# Altium PCB CPU_22032016.PcbDoc
Units mil, origin at the board's own origin, x right, y up, seen from the top; angles counter-clockwise.
Board outline 4448.82 x 2185.04 mil, 2 copper layers (Top Layer, Bottom Layer); 33 components, 52 nets, 244 pads, 21 vias.
Unrouted connection lines stored in the file: 10.
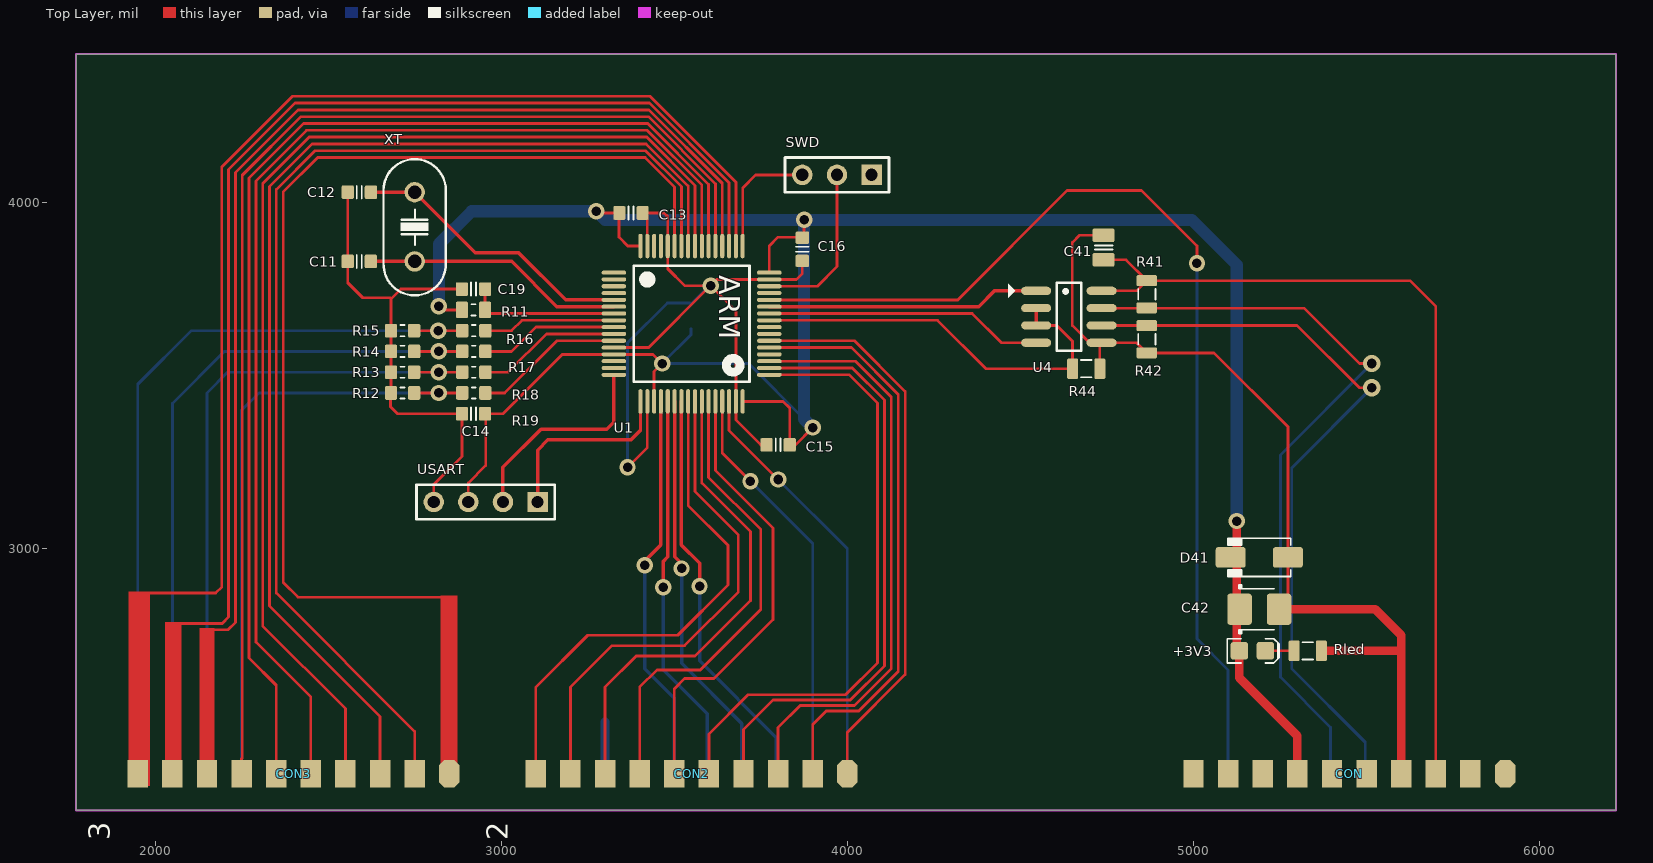
[diagram p0: Top Layer view]
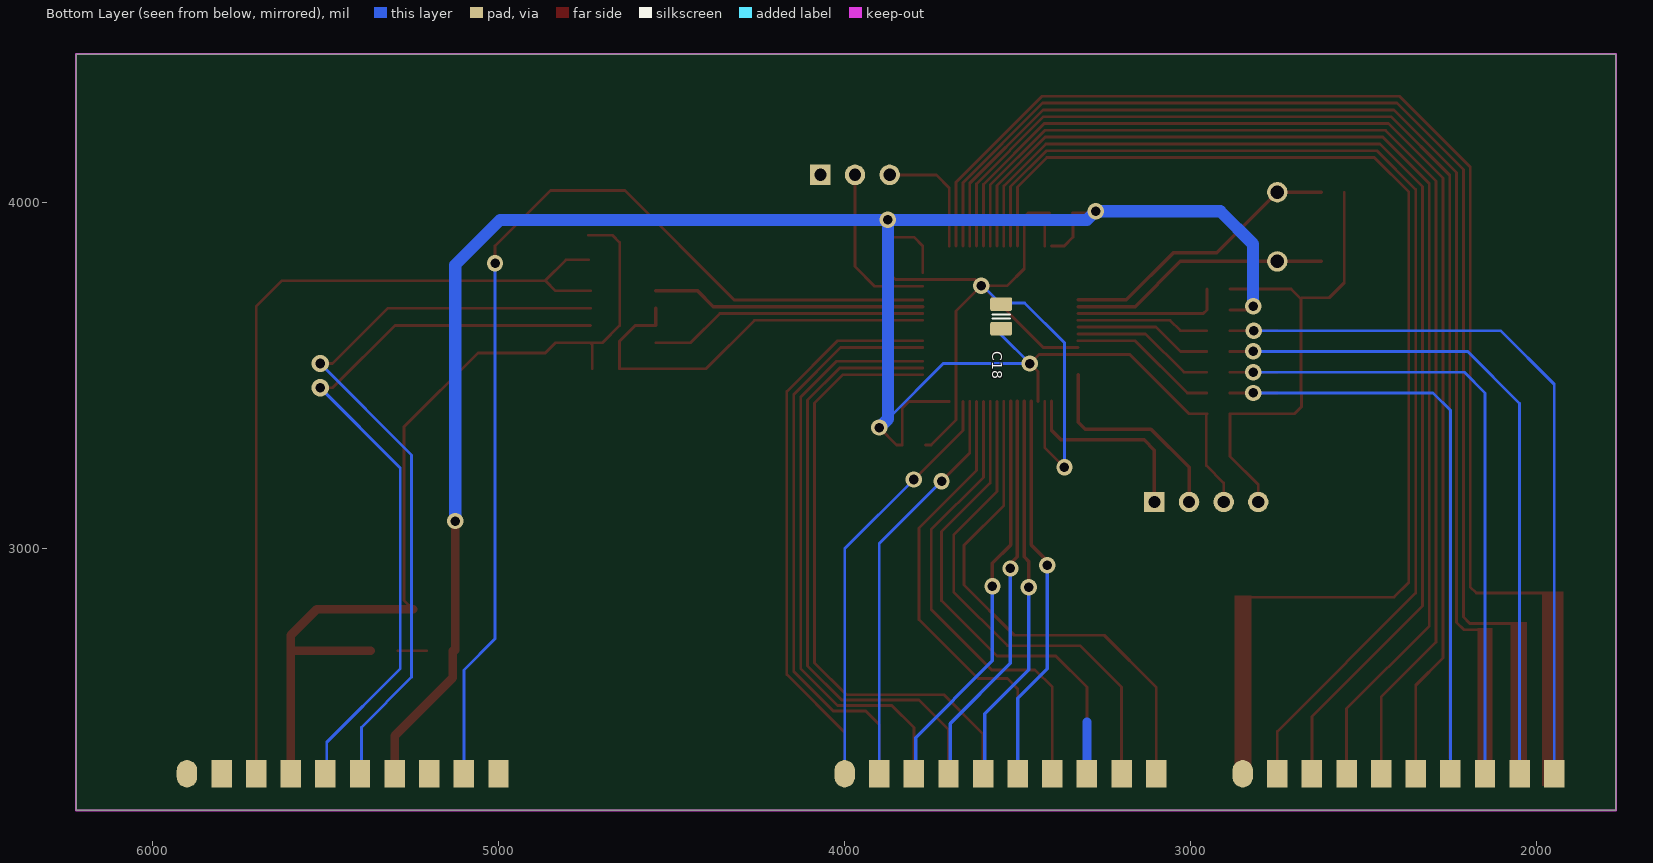
[diagram p1: Bottom Layer view, seen from below]
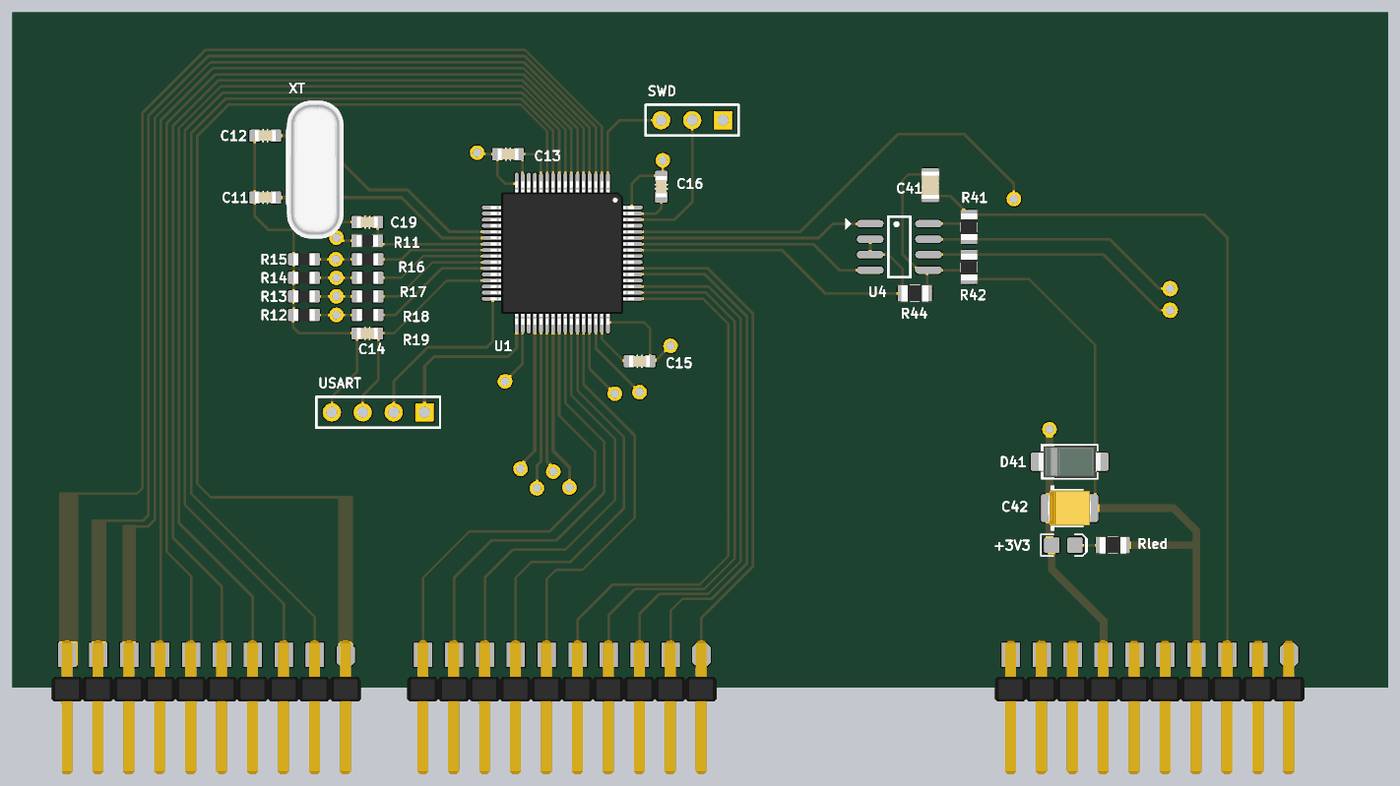
[diagram p2: 3D render of the assembled board from above, using the file's embedded part models]

## Layer stack, top to bottom
Top Solder: solder mask 0.4, Solder Resist, Dk 3.5
Top Layer: signal copper 1.4
Dielectric 1: dielectric 12.6, FR-4, Dk 4.8
Bottom Layer: signal copper 1.4
Bottom Solder: solder mask 0.4, Solder Resist, Dk 3.5

## Board outline
1771.65,2244.09 6220.47,2244.09 6220.47,4429.13 1771.65,4429.13

## Design rules (kind name [scope] priority, off if disabled: settings)
Clearance Clearance_2 [All vs HasPad('FID*')] p1: gap=80
Clearance Clearance_7 [InNet('GND') vs InNet('VAC1')] p2: gap=120
Clearance Clearance_12 [InNet('VAC1') vs InNet('GND')] p3: gap=80
Clearance Clearance_11 [InNet('AGND') vs InNet('GND')] p4: gap=80
Clearance Clearance_8 [InNet('AGND') vs InNet('VAC1')] p5: gap=80
Clearance Clearance_4 [InNet('KDT4') vs (InPoly)] p6: gap=80
Clearance Clearance_5 [InNet('NetK6_2') vs (InPoly)] p7: gap=80
Clearance Clearance_6 [InNet('NetK6_3') vs (InPoly)] p8: gap=80
Clearance Clearance_3 [All vs HasFootprint('XPAD')] p9: gap=2
Clearance Clearance_1 [All vs (InPoly)] p10: gap=40
Clearance [All] p11: gap=7 except(20: Via-Via)
ComponentClearance [All] p1 off: gap=10 collisioncheckmode=3 verticalgap=10 showdistances=FALSE
FabricationTestPointUsage TestPointUsage [All] p1: valid=0 allowmultiple=FALSE
FabricationTestpoint Testpoint [All] p1: side=3 testpointundercomponent=TRUE minsize=40 maxsize=100 preferedsize=60 minholesize=20 maxholesize=40 preferedholesize=32 testpointgrid=1 allowsidetop=TRUE allowsidebottom=TRUE usegrid=TRUE gridtolerance=0.01
HoleSize [All] p1: absolutevalues=TRUE maxlimit=1000 minlimit=0 maxpercent=80.000 minpercent=20.000
PasteMaskExpansion PasteMaskExpansion_1 [HasPad('FID*')] p1: expansion=-160
PasteMaskExpansion [All] p2: expansion=0
PolygonConnect [All] p1: connectstyle=Direct reliefconductorwidth=10 reliefentries=4 polygonreliefangle="90 Angle" airgapwidth=10
RoutingVias [All] p1: holewidth=28 width=50 viastyle="Through Hole" minholewidth=28 minwidth=50 maxholewidth=28 maxwidth=50
SolderMaskExpansion SolderMaskExpansion_1 [HasPad('FID*')] p1: expansion=40
SolderMaskExpansion [All] p2: expansion=4
Width [All] p1: maxlimit=1000 minlimit=5 preferedwidth=40
25 further rules are at their usual default settings.

## Components (designator, comment, footprint, x,y, rotation, side; value= is the part's Value field where it differs from the comment)
+3V3 "Blue" LED-0805-K 5170,2705 r0 top
C11 "Cap_22p_0603" CAPC1608N 2590,3830 r180 top
C12 "Cap_22p_0603" CAPC1608N 2590,4030 r180 top
C13 "Cap_104_0603" CAPC1608N 3375,3970 r180 top
C14 "Cap_104_0603" CAPC1608N 2920,3390 r0 top
C15 "Cap_104_0603" CAPC1608N 3800,3300 r0 top
C16 "Cap_104_0603" CAPC1608N 3870,3865 r90 top
C18 "Cap_10uF_0805" CAPC2012N_F#1 3548,3671 r270 bottom
C19 "Cap_104_0603" CAPC1608N 2920,3750 r0 top
C41 "100nF/104" CAPC2012N_F#2 4740,3870 r270 top
C42 "330uF/25V" CAPMP3528X210N 5190,2825 r0 top
CON "Header 10X2A" OMC10 5900,2350 r180 top
CON2 "Header 10X2A" OMC10 4000,2350 r180 top
CON3 "Header 10X2A" OMC10 2850,2350 r180 top
D41 "Diode" DO-214AC 5190,2975 r180 top
R11 "Res_10k_0603" RESC1608N_F 2920,3690 r180 top
R12 "Res" RESC1608N_ZERO 2715,3450 r180 top
R13 "Res" RESC1608N_ZERO 2715,3510 r180 top
R14 "Res" RESC1608N_ZERO 2715,3570 r0 top
R15 "Res" RESC1608N_ZERO 2715,3630 r0 top
R16 "Res" RESC1608N_ZERO 2920.75,3630 r180 top
R17 "Res" RESC1608N_ZERO 2920.75,3570 r180 top
R18 "Res" RESC1608N_ZERO 2920.75,3510 r180 top
R19 "Res" RESC1608N_ZERO 2920.75,3450 r180 top
R41 "1k" RESC2012N_F 4865,3735 r90 top
R42 "1k" RESC2012N_F 4865,3605 r90 top
R44 "330R" RESC2012N_F 4690,3520 r180 top
Rled "Res_0805_1k" RESC2012N_F 5330,2705 r0 top
SWD "Header 3" HDR1X3 4070,4080 r180 top
U1 "STM32F103RCT6" LQFP64_Tuan 3550,3650 r0 top
U4 "MAX485" SO-8 4640,3670 r0 top
USART "Header 4" HDR1X4 3105,3135 r180 top
XT "8MHz" XT2 2750,3930 r90 top

## Footprints (in the part's own frame and the unit in brackets; to place one, negate y for a bottom-side part, rotate by r counter-clockwise, add the part's x,y. Pads: shape width x height; smd on the part's side, far side on the other; paste and mask are expansions set on the pad)
CAPC1608N [mm] "Chip Capacitor, Body 1.6x0.8mm, 0603, IPC Medium Density"
  round 0.254 on Mech14: 0(0,0)
  rrect25% 0.9x1 smd: 1(-0.85,0) 2(0.85,0)
  Top Layer pour cut-out: -0.4,0.6 0.4,0.6 0.4,-0.6 -0.4,-0.6
  silkscreen extent -0.18,-0.48 0.18,0.48, body extent -0.85,-0.45 0.85,0.45, height 0.89
CAPC2012N_F#1 [mm] "Chip Capacitor, Body 2.0x1.2mm, 0805, IPC Medium Density, for Flex circuits"
  round 0.254 on Mech14: 0(0,0)
  rrect25% 1.2x1.4 on Bottom Solder: 1(-0.9,0) 1(0.9,0)
  rrect25% 1x1.6 smd paste-1: 1(-0.9,0) 2(0.9,0)
  rrect25% 1x1.4 on Bottom Paste: 1(-0.9,0) 1(0.9,0)
  Top Layer pour cut-out: -0.4,0.8 0.4,0.8 0.4,-0.8 -0.4,-0.8
  silkscreen extent -0.15,-0.65 0.15,0.65, body extent -1.1,-0.72 1.1,0.73, height 1.34
CAPC2012N_F#2 [mm] "Chip Capacitor, Body 2.0x1.2mm, 0805, IPC Medium Density, for Flex circuits"
  round 0.254 on Mech14: 0(0,0)
  rrect25% 1.2x1.4 on Top Solder: 1(-0.9,0) 1(0.9,0)
  rrect25% 1x1.6 smd paste-1: 1(-0.9,0) 2(0.9,0)
  rrect25% 1x1.4 on Top Paste: 1(-0.9,0) 1(0.9,0)
  Top Layer pour cut-out: -0.4,0.8 0.4,0.8 0.4,-0.8 -0.4,-0.8
  silkscreen extent -0.15,-0.65 0.15,0.65, body extent -1.1,-0.72 1.1,0.73, height 1.34
CAPMP3528X210N [mm] "Molded body capacitor, Body 3.5x2.8mm, 1210, IPC Nominal settings"
  round 0.254 on Mech14: 0(0,0)
  rrect25% 1.8x2.3 smd: 1(-1.45,0) 2(1.45,0)
  Top Layer pour cut-out: -0.508,1.27 0.508,1.27 0.508,-1.27 -0.508,-1.27
  silkscreen extent -1.5,-1.8 1.1,1.8, body extent -1.75,-1.4 1.75,1.4, height 2.1
DO-214AC [mm] "JEDEC DO214 variation AC. SMA"
  round 0.508 on Mech14: 0(0,0)
  rrect25% 2.2x1.5 smd: A(-2.1,0) K(2.1,0)
  silkscreen extent -2.3,-1.4 2.3,1.4, body extent -2.6,-1.3 2.6,1.3, height 2.42
HDR1X3 [mm] "Connector; Header; 3 Position"
  rect 1.5x1.5 hole 0.9: 1(0,0)
  round 1.5 hole 0.9: 2(2.54,0) 3(5.08,0)
  silkscreen extent -1.27,-1.27 6.35,1.27, body extent -1.27,-1.27 6.35,1.27, height 7
HDR1X4 [mm] "Connector; Header; 4 Position"
  rect 1.5x1.5 hole 0.9: 1(0,0)
  round 1.5 hole 0.9: 2(2.54,0) 3(5.08,0) 4(7.62,0)
  silkscreen extent -1.27,-1.27 8.89,1.27, body extent -1.27,-1.27 8.89,1.27, height 7
LED-0805-K [mil]
  round 20 on Mech14: 0(0,0)
  rrect25% 50x50 smd: A(-37.5,0) K(37.5,0)
  Top Layer pour cut-out: -15,30 15,30 15,-30 -15,-30
  silkscreen extent -72,-35 77,35, body extent -39,-25 39,25, height 31
LQFP64_Tuan [mm] "Thin QFP, 64-Leads, Body 10x10mm, Pitch 0.5mm, IPC Medium Density"
  oval 1.8x0.3 smd: 1(-5.7,3.75) 2(-5.7,3.25) 3(-5.7,2.75) 4(-5.7,2.25) 5(-5.7,1.75) 6(-5.7,1.25) 7(-5.7,0.75) 8(-5.7,0.25) 9(-5.7,-0.25) 10(-5.7,-0.75) 11(-5.7,-1.25) 12(-5.7,-1.75) 13(-5.7,-2.25) 14(-5.7,-2.75) 15(-5.7,-3.25) 16(-5.7,-3.75) 33(5.7,-3.75) 34(5.7,-3.25) 35(5.7,-2.75) 36(5.7,-2.25) 37(5.7,-1.75) 38(5.7,-1.25) 39(5.7,-0.75) 40(5.7,-0.25) 41(5.7,0.25) 42(5.7,0.75) 43(5.7,1.25) 44(5.7,1.75) 45(5.7,2.25) 46(5.7,2.75) 47(5.7,3.25) 48(5.7,3.75)
  oval 0.3x1.8 smd: 17(-3.75,-5.7) 18(-3.25,-5.7) 19(-2.75,-5.7) 20(-2.25,-5.7) 21(-1.75,-5.7) 22(-1.25,-5.7) 23(-0.75,-5.7) 24(-0.25,-5.7) 25(0.25,-5.7) 26(0.75,-5.7) 27(1.25,-5.7) 28(1.75,-5.7) 29(2.25,-5.7) 30(2.75,-5.7) 31(3.25,-5.7) 32(3.75,-5.7) 49(3.75,5.7) 50(3.25,5.7) 51(2.75,5.7) 52(2.25,5.7) 53(1.75,5.7) 54(1.25,5.7) 55(0.75,5.7) 56(0.25,5.7) 57(-0.25,5.7) 58(-0.75,5.7) 59(-1.25,5.7) 60(-1.75,5.7) 61(-2.25,5.7) 62(-2.75,5.7) 63(-3.25,5.7) 64(-3.75,5.7)
  silkscreen extent -4.25,-4.25 4.25,4.25, body extent -5.89,-5.89 5.89,5.89, height 1.58
OMC10 [mm]
  oct 1.5x2 smd: 1(0,0)
  rect 1.5x2 smd: 2(2.54,0) 3(5.08,0) 4(7.62,0) 5(10.16,0) 6(12.7,0) 7(15.24,0) 8(17.78,0) 9(20.32,0) 10(22.86,0)
  oval 1.5x2 smd far side: 11(0,0)
  rect 1.5x2 smd far side: 12(2.54,0) 13(5.08,0) 14(7.62,0) 15(10.16,0) 16(12.7,0) 17(15.24,0) 18(17.78,0) 19(20.32,0) 20(22.86,0)
  body extent -1.24,-1.18 24.16,9.82, height 2.33
RESC1608N_F [mm] "Chip Resistor, Body 1.6x0.8mm, 0603, IPC Medium Density, for Flex circuits"
  round 0.254 on Mech14: 0(0,0)
  rrect25% 1.1x1 on Top Solder: 1(-0.85,0) 1(0.85,0)
  rrect25% 0.9x1.2 smd paste-1: 1(-0.85,0) 2(0.85,0)
  rrect25% 0.9x1 on Top Paste: 1(-0.85,0) 1(0.85,0)
  Top Layer pour cut-out: -0.4,0.6 0.4,0.6 0.4,-0.6 -0.4,-0.6
  silkscreen extent -0.15,-0.41 0.15,0.41, body extent -0.87,-0.47 0.88,0.48, height 0.54
RESC1608N_ZERO [mm] "Chip Resistor, Body 1.6x0.8mm, 0603, IPC Medium Density"
  round 0.254 on Mech14: 0(0,0)
  rrect25% 0.9x1 smd: 1(-0.85,0) 2(0.85,0)
  Top Layer pour cut-out: -0.4,0.6 0.4,0.6 0.4,-0.6 -0.4,-0.6
  silkscreen extent -0.15,-0.41 0.15,0.41, body extent -0.87,-0.47 0.88,0.48, height 0.54
RESC2012N_F [mm] "Chip Resistor, Body 2.0x1.2mm, 0805, IPC Medium Density"
  round 0.254 on Mech14: 0(0,0)
  rrect25% 1x1.3 on Top Solder: 1(-1,0) 1(1,0)
  rrect25% 0.8x1.5 smd paste-1: 1(-1,0) 2(1,0)
  rrect25% 0.8x1.3 on Top Paste: 1(-1,0) 1(1,0)
  Top Layer pour cut-out: -0.6,0.75 0.6,0.75 0.6,-0.75 -0.6,-0.75
  silkscreen extent -0.38,-0.64 0.38,0.64, body extent -1.1,-0.67 1.1,0.68, height 0.69
SO-8 [mm] "8-Pin Small Outline Integrated Circuit 1.27 mm Pitch, IPC Medium Density"
  oval 2.2x0.6 smd: 1(-2.4,1.905) 2(-2.4,0.635) 3(-2.4,-0.635) 4(-2.4,-1.905) 5(2.4,-1.905) 6(2.4,-0.635) 7(2.4,0.635) 8(2.4,1.905)
  silkscreen extent -4.44,-2.5 0.9,2.5, body extent -1.95,-2.45 1.95,2.45, height 1.75
XT2 [mm]
  round 1.5 hole 1: 1(-2.54,0) 2(2.54,0)
  silkscreen extent -5.03,-2.29 4.96,2.29, body extent -5.93,-2.36 5.42,2.29, height 3.5

## Part data
+3V3: library part LED_SMD_Blue_0805_100mcd, "LED 0805 SMD Blue 100mcd 470nm"
C11 C12 C13 C14 C15 C16 C18 C19 C41: library part "CAP NP"
C42: library part CP4, "Cap 1000uF/16V - 220uF/50V"
CON CON2 CON3: "Header, 10-Pin, Dual row"
R11 Rled: library part Res
R41 R42 R44: library part Res, "Tro dan"
SWD: "Header, 3-Pin"
U1: "ARM Cortex-M3 32-bit MCU, 256 KB Flash, 48 KB Internal RAM, 51 I/Os, 64-pin LQFP, -40 to 85 degC, Tray"
U4: "RS232 - RS485 (Same sn75176)"
USART: "Header, 4-Pin"
XT: library part Crystal

## Via types
v1: diameter 47.24, hole 27.56, Top Layer to Bottom Layer, 19 vias
v2: diameter 50, hole 28, Top Layer to Bottom Layer, 2 vias

## Nets (pads, with @x,y where several pads share a name; then routed paths per layer and width w, separated by ;. In a path a pad name is that pad's centre, name@x,y a point inside that pad or via, vN(x,y) a via of type N, cw(c..) or ccw(c..) an arc to the next point about the centre after c; other vN are vias at no path point)
+3V3: +3V3.A C13.2 C14.2 C15.2 C16.2 C18.2 C42.1 CON.7 CON.17 D41.K R11.2 U1.13 U1.19 U1.32 U1.48 U1.64 USART.3 | length 7191.9
  Top Layer w8: v1@2825,3690 R11.2 ; USART.3 2905,3190 2955,3240 2955,3388.46 C14.2 3005,3390 3176.42,3561.42 U1.13 3438.58,3561.42 v1(3465,3535) 3441.73,3511.73 U1.19 ; v1(3275,3975) 3280,3970 C13.2 3340,3968.46 3340,3900 3365.59,3874.41 U1.64 ; U1.32 3814.41,3425.59 3833.46,3406.54 C15.2 3850,3300 v1(3900,3350) ; U1.48 3774.41,3874.41 3800,3900 3868.46,3900 3875,3906.54 v1(3875,3950)
  Top Layer w25: v1(5125,3080) 5125,2707.5 +3V3.A@5132.5,2700 ; +3V3.A +3V3.A@5132.5,2700 ; CON.7 5300,2460 5132.5,2627.5 +3V3.A@5132.5,2700
  Bottom Layer w8: C18.2 3548,3618 v1(3465,3535) 3715,3535 3875,3375
  Bottom Layer w35: v1(2820,3700) 2820,3880 2915,3975 v1(3275,3975) 3300,3950 v1(3875,3950) ; v1(3900,3350) 3875,3375 v1(3875,3950) ; v1(5125,3080) 5125,3820 4995,3950 v1(3875,3950)
+5V_IN: C41.2 CON2.17 CON.3 CON.13 R41.2 U4.8 | length 2508.4
  Top Layer w8: U4.8 4835.63,3745 R41.2 ; C41.2 4804.8,3834.57 R41.2 ; CON.3 5700,3700 5625.63,3774.37 R41.2
+12V_IN: CON.1 CON.11
ADCX_IN10: R16.1 U1.8 | length 383.7
  Top Layer w8: R16.1 3030,3630 3059.84,3659.84 U1.8
ADCX_IN11: R17.1 U1.9 | length 400.4
  Top Layer w8: R17.1 3030,3570 3100.16,3640.16 U1.9
ADCX_IN12: R18.1 U1.10 | length 417.1
  Top Layer w8: R18.1 3020,3510 3130.47,3620.47 U1.10
ADCX_IN13: R19.1 U1.11 | length 433.8
  Top Layer w8: R19.1 3010,3450 3160.79,3600.79 U1.11
AUX1: CON3.9 U1.51 | length 3265.5
  Top Layer w8: 2051,2784 2194,2784 2212.52,2802.52 2212.52,4095.23 2404.77,4287.48 3428.01,4287.48 3658.27,4057.23 U1.51
AUX2: CON3.8 U1.52 | length 3190
  Top Layer w8: 2146,2763 2149,2766 2211.2,2766 2232.2,2787 2232.2,4087.08 2412.92,4267.8 3426.48,4267.8 3638.58,4055.7 U1.52 ; CON3.8 2150,2393.37
AUX3: CON3.7 U1.53 | length 3426.9
  Top Layer w8: CON3.7 2250,2393.37 2251.89,2395.26 2251.89,4078.92 2421.08,4248.11 3424.96,4248.11 3618.9,4054.17 U1.53
AUX4: CON3.6 U1.54 | length 3397.2
  Top Layer w8: CON3.6 2350,2605.57 2271.57,2684 2271.57,4070.77 2429.23,4228.43 3423.43,4228.43 3599.21,4052.64 U1.54
AUX5: CON3.5 U1.55 | length 3369.2
  Top Layer w8: CON3.5 2450,2571.26 2291.26,2730 2291.26,4062.62 2437.38,4208.74 3421.9,4208.74 3579.53,4051.11 U1.55
AUX6: CON3.4 U1.56 | length 3341.1
  Top Layer w8: CON3.4 2550,2537.94 2310.94,2777 2310.94,4054.46 2445.54,4189.06 3420.37,4189.06 3559.84,4049.58 U1.56
AUX7: CON3.3 U1.57 | length 3313
  Top Layer w8: CON3.3 2650,2515.63 2330.63,2835 2330.63,4046.31 2453.69,4169.37 3418.84,4169.37 3540.16,4048.06 U1.57
AUX8: CON3.2 U1.58 | length 3284.9
  Top Layer w8: CON3.2 2750,2472.32 2350.32,2872 2350.32,4038.15 2461.85,4149.69 3417.32,4149.69 3520.47,4046.53 U1.58
AUX9: CON3.1 U1.59 | length 3069.8
  Top Layer w8: 2844,2860 2413,2860 2370,2903 2370,4030 2470,4130 3415.79,4130 3500.79,4045 U1.59 ; CON3.1 2850,2423
COLUM1: CON2.7 U1.27 | length 1356.2
  Top Layer w8: CON2.7 3400,2600 3450,2650 3575,2650 3750,2825 3750,3055 3599.21,3205.79 U1.27
COLUM2: CON2.8 U1.26 | length 1407.3
  Top Layer w8: CON2.8 3300,2600 3390,2690 3560,2690 3720,2850 3720,3049.53 3579.53,3190 U1.26
COLUM3: CON2.9 U1.25 | length 1451.3
  Top Layer w8: CON2.9 3200,2600 3320,2720 3530,2720 3685,2875 3685,3040 3559.84,3165.16 U1.25
COLUM4: CON2.10 U1.24 | length 1505.4
  Top Layer w8: CON2.10 3100,2600 3250,2750 3510,2750 3655,2895 3655,3010 3540.16,3124.84 U1.24
EX_OSC_IN: C12.1 U1.5 XT.2 | length 831
  Top Layer w10: C12.1 XT.2 2925,3855 3050,3855 3186.1,3718.9 U1.5
EX_OSC_OUT: C11.1 U1.6 XT.1 | length 756.3
  Top Layer w10: C11.1 XT.1 3030,3830 3160.79,3699.21 U1.6
GATEA: CON3.20 R15.2 R16.2 | length 2195.9
  Top Layer w8: R15.2 v1(2817.87,3630) R16.2
  Bottom Layer w8: CON3.20 1950,3475 2105,3630 v1(2817.87,3630)
GLCD_BL: CON2.13 U1.23 | length 1191.4
  Top Layer w10: U1.23 3520.47,3010.84 3573,2958.31 v1(3573,2892)
  Bottom Layer w10: v1(3573,2892) 3573,2676 3795,2454 3795,2355 CON2.13
GLCD_EN: CON2.14 U1.22 | length 1158.1
  Top Layer w10: U1.22 3500.79,2976.28 3521,2956.07 v1(3521,2943)
  Bottom Layer w10: v1(3521,2943) 3521,2668.96 3695,2494.96 3695,2355 CON2.14
GLCD_RS: CON2.16 U1.20 | length 1130
  Top Layer w10: v1(3415,2952) 3415,2964.42 3461.42,3010.84 U1.20
  Bottom Layer w10: v1(3415,2952) 3415,2653 3500,2568 CON2.16
GLCD_RW: CON2.15 U1.21 | length 1135.7
  Top Layer w10: v1(3468,2889) 3468,2963.18 3481.1,2976.28 U1.21
  Bottom Layer w10: v1(3468,2889) 3468,2650 3595,2523 3595,2355 CON2.15
GND: C11.2 C12.2 C13.1 C14.1 C15.1 C16.1 C18.1@3548,3706.43 C19.1 C41.1@4740,3905.43 C42.2 CON2.18 CON.2 CON.4 CON.12 CON.14 D41.A R12.2 R13.2 R14.1 R15.1 R42.1@4865,3565.63 R44.1@4729.37,3520 Rled.2 SWD.1 U1.12 U1.18 U1.31 U1.47 U1.60 U1.63 U4.5 USART.4 | length 6866.9
  Top Layer w8: C12.2 C11.2 2556.54,3768.46 2600,3725 2678.07,3725 2681.54,3721.54 ; USART.4 2805,3185 2886.54,3266.54 C14.1 2700,3390 2680,3410 2680,3448.46 R12.2 R14.1 R15.1 2681.54,3721.54 ; C19.1 2710,3750 2681.54,3721.54 ; U1.12 3426.1,3581.1 v1(3605,3760) ; v1(3365,3235) 3422.05,3292.05 U1.18 ; U1.63 3422.05,3956.42 C13.1 3470,3970 3481.1,3958.9 U1.60 3481.1,3808.9 3530,3760 v1(3605,3760) ; C15.1 3750,3300 3677.95,3372.05 U1.31 3677.95,3687.05 v1(3605,3760) ; C16.1@3865,3826.54 C16.1 3870,3795 3852.95,3777.95 U1.47 3622.95,3777.95 v1(3605,3760) ; R44.1@4729.37,3520 4729.37,3589.88 U4.5 ; C41.1@4740,3905.43 4670.43,3905.43 4650,3885 4650,3645 4700,3595 U4.5 ; C42.2 5272.68,2850.59 D41.A 5272.68,3352.32 5059.37,3565.63 4865,3565.63 4835.63,3595 U4.5
  Top Layer w25: C42.2 5525,2825 5600,2750 CON.4 ; Rled.2 5595,2705
  Bottom Layer w8: v1(3365,3235) 3365,3595 3480,3710 3544.43,3710 3548,3706.43 3601.57,3760 v1(3605,3760)
  Bottom Layer w25: CON2.18 3300,2500
I2C2_SCL: CON2.12 U1.29 | length 1183.9
  Top Layer w8: U1.29 3638.58,3276.42 v1(3720,3195)
  Bottom Layer w8: v1(3720,3195) 3900,3015 CON2.12
I2C2_SDA: CON2.11 U1.30 | length 1217.1
  Top Layer w8: U1.30 3658.27,3341.73 v1(3800,3200)
  Bottom Layer w8: v1(3800,3200) 4000,3000 CON2.11
IDC: CON.9 CON.19 U1.44 | length 2995.1
  Top Layer w8: U1.44 4318.9,3718.9 4635,4035 4850,4035 5010,3875 v1(5010,3825)
  Bottom Layer w8: v1(5010,3825) 5010,2740 5100,2650 CON.19
Net+3V3_K: +3V3.K Rled.1@5290.63,2705 | length 83.1
  Top Layer w8: +3V3.K Rled.1@5290.63,2705
NRST: C19.2 R11.1@2953.46,3690 U1.7 | length 436.5
  Top Layer w8: C19.2 2953.46,3690 2963.94,3679.53 U1.7
"PIR A": CON3.17 R12.1 R19.2 | length 1779.5
  Top Layer w8: R12.1 v1(2820,3450) R19.2
  Bottom Layer w8: CON3.17 2250,3400 2300,3450 v1(2820,3450)
ROW1: CON2.3 U1.35 | length 1710.5
  Top Layer w8: U1.35 4022.84,3541.73 4127,3437.57 4127,2653.43 4020.57,2547 3864,2547 3800,2483 CON2.3
ROW2: CON2.4 U1.34 | length 1749.7
  Top Layer w8: CON2.4 3700,2478 3785,2563 4008.28,2563 4107,2661.72 4107,3429.28 4014.24,3522.05 U1.34
ROW3: CON2.5 U1.33 | length 1784.2
  Top Layer w8: CON2.5 3600,2465 3713,2578 3995,2578 4087,2670 4087,3421 4005.64,3502.36 U1.33
ROW4: CON2.6 U1.28 | length 1312.2
  Top Layer w8: CON2.6 3500,2595 3530,2625 3615,2625 3785,2795 3785,3060 3618.9,3226.1 U1.28
RS485A: CON.5 CON.15 R42.2 U4.6 | length 2155.2
  Top Layer w8: U4.6 5299,3645 5479,3465 v2(5515,3465)
  Bottom Layer w8: CON.15 5496,2354 5496,2441 5284,2653 5284,3234 v2(5515,3465)
RS485B: CON.6 CON.16 R41.1@4865,3695.63 U4.7 | length 2202.9
  Top Layer w8: U4.7 5319.71,3695 5479.71,3535 v2(5515,3535)
  Bottom Layer w8: CON.16 5396,2354 5396,2484 5251,2629 5251,3271 v2(5515,3535)
RS485D: R44.2 U1.41 U4.2 U4.3 | length 1187.5
  Top Layer w8: U1.41 4260.16,3659.84 4400,3520 R44.2 4650.63,3599.37 4605,3645 U4.3
  Top Layer w10: U4.3 U4.2
SHT_SCL: CON2.1 U1.38 | length 1626.6
  Top Layer w8: U1.38 4020.35,3600.79 4167,3454.14 4167,2636.86 4000,2469.86 CON2.1
SHT_SDA: CON2.2 U1.37 | length 1681.8
  Top Layer w8: U1.37 4011.75,3581.1 4147,3445.85 4147,2645.15 4032.85,2531 3939,2531 3900,2492 CON2.2
"SMOKE A": CON3.19 R14.2 R17.2 | length 2041
  Top Layer w8: R14.2 v1(2820,3570) R17.2
  Bottom Layer w8: CON3.19 2050,3420 2200,3570 v1(2820,3570)
"SMOKE POWER": CON3.10 U1.50 | length 3740.8
  Top Layer w8: 1953,2872 2175,2872 2192.83,2889.83 2192.83,4103.38 2396.62,4307.17 3429.54,4307.17 3677.95,4058.75 U1.50
  Top Layer w10: CON3.10 1950,2694.74 cw(c2050,2694.74) 1979.29,2765.45
SWCLK: SWD.3 U1.49 | length 356.1
  Top Layer w8: U1.49 3697.64,4042.64 3735,4080 SWD.3
SWDIO: SWD.2 U1.46 | length 484.1
  Top Layer w8: U1.46 3913.27,3758.27 3970,3815 SWD.2
USART1_RX: U1.43 U4.1 | length 790.1
  Top Layer w10: U1.43 4379.21,3699.21 4425,3745 U4.1
USART1_TX: U1.42 U4.4 | length 806.1
  Top Layer w8: U1.42 4360.47,3679.53 4445,3595 U4.4
USART2_RX: U1.17 USART.1 | length 554.4
  Top Layer w10: USART.1 3105,3285 3135,3315 3375,3315 3402.36,3342.36 U1.17
USART2_TX: U1.16 USART.2 | length 611.5
  Top Layer w10: USART.2 3005,3235 3115,3345 3305,3345 3325.59,3365.59 U1.16
"WATER A": CON3.18 R13.1 R18.2 | length 1933.7
  Top Layer w8: R13.1 v1(2820,3510) R18.2
  Bottom Layer w8: CON3.18 2150,3450 2210,3510 v1(2820,3510)
pads on no net: +3V3.0 C11.0 C12.0 C13.0 C14.0 C15.0 C16.0 C18.0 C18.1@3548,3635.57 C18.1@3548,3706.43 C18.1@3548.01,3635.57 C18.1@3548.01,3706.44 C19.0 C41.0 C41.1@4739.99,3834.57 C41.1@4739.99,3905.44 C41.1@4740,3834.57 C41.1@4740,3905.43 C42.0 CON2.19 CON2.20 CON3.11 CON3.12 CON3.13 CON3.14 CON3.15 CON3.16 CON.8 CON.10 CON.18 CON.20 D41.0 R11.0 R11.1@2886.53,3689.99 R11.1@2886.54,3690 R11.1@2953.46,3689.99 R11.1@2953.46,3690 R12.0 R13.0 R14.0 R15.0 R16.0 R17.0 R18.0 R19.0 R41.0 R41.1@4865,3695.63 R41.1@4865,3774.37 R41.1@4865.01,3695.63 R41.1@4865.01,3774.37 R42.0 R42.1@4865,3565.63 R42.1@4865,3644.37 R42.1@4865.01,3565.63 R42.1@4865.01,3644.37 R44.0 R44.1@4650.63,3520 R44.1@4650.63,3520.01 R44.1@4729.37,3520 R44.1@4729.37,3520.01 Rled.0 Rled.1@5290.63,2704.99 Rled.1@5290.63,2705 Rled.1@5369.37,2704.99 Rled.1@5369.37,2705 U1.1 U1.2 U1.3 U1.4 U1.14 U1.15 U1.36 U1.39 U1.40 U1.45 U1.61 U1.62

## Keep-outs
Keep-Out Layer:
  lines w5.91: 1771.65,2244.09 6141.73,2244.09 6220.47,2244.09 6220.47,4429.13 1771.65,4429.13 1771.65,2244.09

## Other copper
Top Layer:
  rectangle net AUX9: 2825,2331 2874,2865
  rectangle net AUX2: 2128,2324 2172,2771
  rectangle net AUX1: 2029,2333 2076,2788
  rectangle net "SMOKE POWER": 1923,2315 1985,2876

## Dimensions
1673.23,2263.78 to 1673.23,4429.13 on Top Overlay
1771.65,2125.98 to 6220.47,2047.24 on Top Overlay

## Text inside footprints (layer, text, board x,y; h text height)
U1: Top Overlay "ARM" at 3630,3790 h60 r270